# Altium PCB Can_Bus.PcbDoc
Units mm, origin at the board's own origin, x right, y up, seen from the top; angles counter-clockwise.
Board outline 23.9 x 15.9 mm, 2 copper layers (Top Layer, Bottom Layer); 8 components, 8 nets, 30 pads, 2 vias.
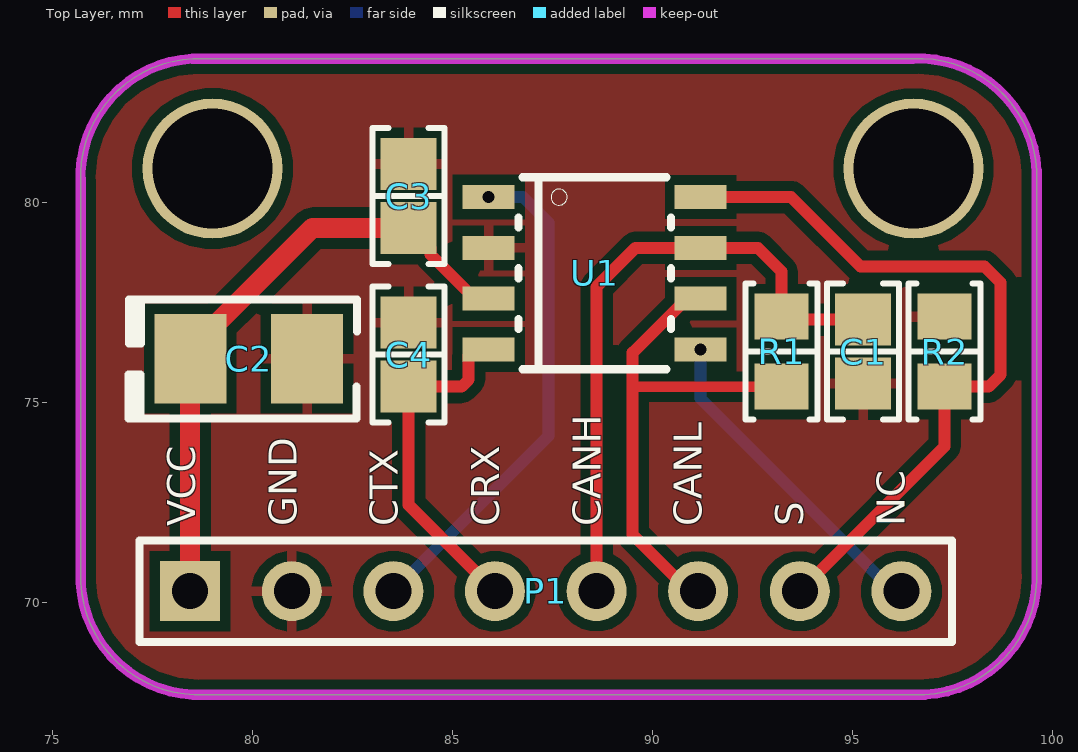
[diagram p0: Top Layer view]
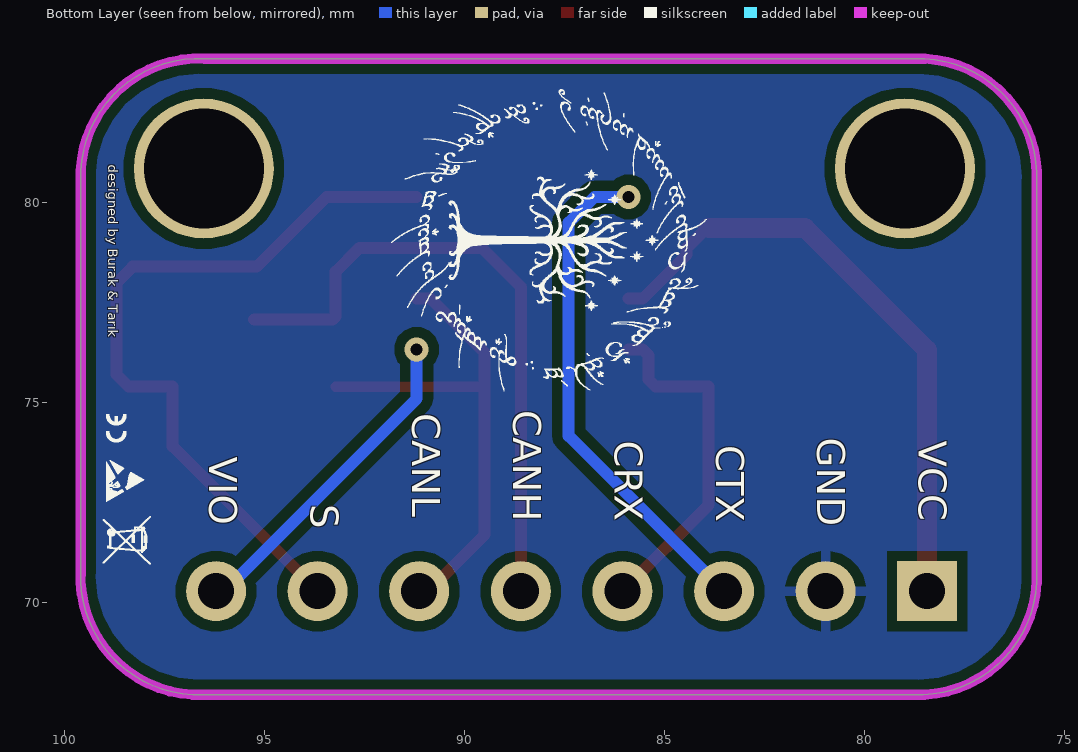
[diagram p1: Bottom Layer view, seen from below]
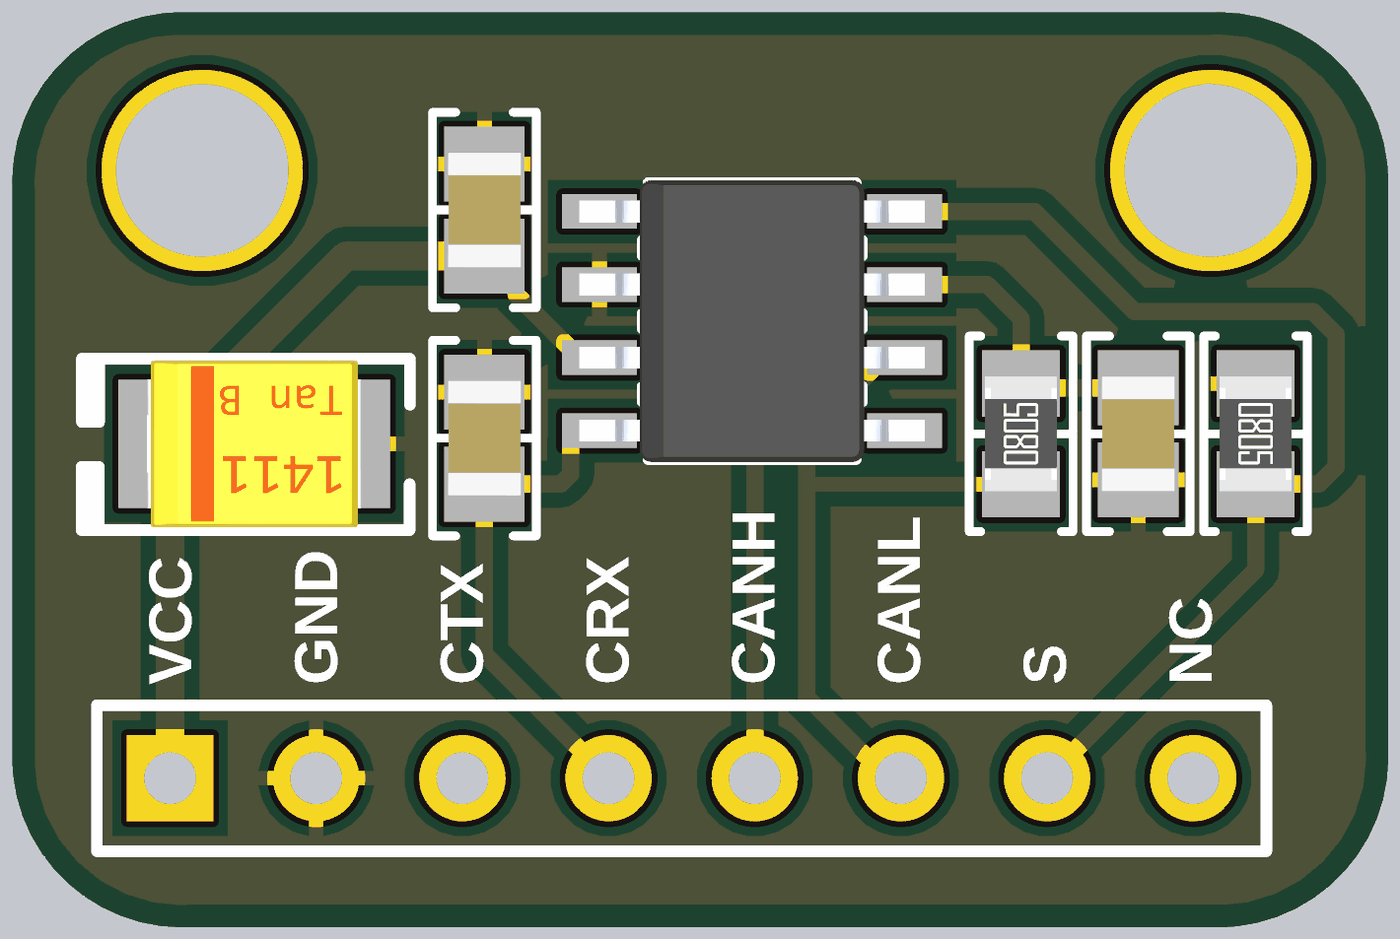
[diagram p2: 3D render of the assembled board from above, using the file's embedded part models]

## Layer stack, top to bottom
Top Solder: solder mask 0.0102, Solder Resist, Dk 3.5
Top Layer: signal copper 0.0356
Dielectric 1: dielectric 0.32, FR-4, Dk 4.8
Bottom Layer: signal copper 0.0356
Bottom Solder: solder mask 0.0102, Solder Resist, Dk 3.5

## Board outline
75.7,70.5 75.7,80.5 cw(c78.65,80.65) 78.5,83.6 96.5,83.6 cw(c96.65,80.65) 99.6,80.8 99.6,70.8 cw(c96.65,70.65) 96.8,67.7 78.8,67.7 cw(c78.65,70.65)

## Design rules (kind name [scope] priority, off if disabled: settings)
Clearance [All] p1: gap=0.254 ignorepadtopadclearanceinfootprint=FALSE except(0: Arc-Hole Track-Hole SMDPad-Hole THPad-Hole Via-Hole Fill-Hole Poly-Hole Region-Hole Text-Hole; 0.1: Arc-Text Track-Text SMDPad-Text THPad-Text Via-Text Fill-Text Poly-Text Region-Text Text-Text)
HoleSize [All] p1: absolutevalues=TRUE maxlimit=3.5 minlimit=0.025 maxpercent=80.000 minpercent=20.000
MinimumSolderMaskSliver [All] p1: minsoldermaskwidth=0.05
PolygonConnect [All] p1: connectstyle=Relief reliefconductorwidth=0.254 reliefentries=4 polygonreliefangle="90 Angle" airgapwidth=0.254
RoutingVias [InNet('No Net') And InDrillLayerPair('No Drill Pair')] p1: holewidth=3 width=3 viastyle="Through Hole" minholewidth=0.2 minwidth=0.2 maxholewidth=4 maxwidth=4
SilkToSilkClearance [All] p1: silktosilkclearance=0.1
SilkToSolderMaskClearance [IsPad] p1: minsilkscreentomaskgap=0.05 clearancetoexposedcopper=TRUE
SolderMaskExpansion [All] p1: expansion=0.102 istentingtop=FALSE
Width [All] p1: maxlimit=1.5 minlimit=0.254 preferedwidth=0.3 minimp=50.000000 maximp=50.000000 favimp=50.000000
26 further rules are at their usual default settings.

## Components (designator, comment, footprint, x,y, rotation, side; value= is the part's Value field where it differs from the comment)
C1 "100 pF" "CAP 0805_2012" 95.262,76.275 r90 top
C2 "47 µF" "CAP POL 1411_3528" 79.9,76.1 r0 top
C3 "0.1 µF" "CAP 0805_2012" 83.9,80.167 r270 top
C4 "15pF" "CAP 0805_2012" 83.9,76.2 r270 top
P1 "Header 8" HDR1X8 78.437,70.287 r0 top
R1 "120 Ohms" "RES 0805_2012" 93.225,76.275 r90 top
R2 "10 kOhms" "RES 0805_2012" 97.3,76.275 r270 top
U1 "TJA1051" SO8 86.01,80.14 r0 top

## Footprints (in the part's own frame and the unit in brackets; to place one, negate y for a bottom-side part, rotate by r counter-clockwise, add the part's x,y. Pads: shape width x height; smd on the part's side, far side on the other; paste and mask are expansions set on the pad)
"CAP 0805_2012" [mm] "Chip Capacitor, 2-Leads, Body 2.00x1.20mm, IPC Medium Density"
  rect 1.3x1.4 smd: 1(-0.8,0) 2(0.8,0)
  silkscreen extent -1.7,-0.9 1.7,0.9, body extent -1,-0.64 1,0.64, height 1.26
"CAP POL 1411_3528" [mm] "Molded Capacitor, 2-Leads, Body 3.50x2.80mm, IPC Medium Density"
  rect 1.8x2.23 smd: 1(-1.46,0) 2(1.46,0)
  silkscreen extent -3,-1.5 2.71,1.48, body extent -1.87,-1.45 1.86,1.45, height 2
HDR1X8 [mm] "Connector; Header; 8 Position"
  rect 1.5x1.5 hole 0.9: 1(0,0)
  round 1.5 hole 0.9: 2(2.54,0) 3(5.08,0) 4(7.62,0) 5(10.16,0) 6(12.7,0) 7(15.24,0) 8(17.78,0)
  silkscreen extent -1.27,-1.27 19.05,1.27
"RES 0805_2012" [mm] "Chip Resistor, 2-Leads, Body 2.00x1.25mm, IPC Medium Density"
  rect 1.15x1.35 smd: 1(-0.875,0) 2(0.875,0)
  silkscreen extent -1.7,-0.9 1.7,0.9, body extent -1,-0.62 1,0.63, height 0.6
SO8 [mm]
  rect 1.3x0.6 smd: 1(-0.11,0) 2(-0.11,-1.27) 3(-0.11,-2.54) 4(-0.11,-3.81) 5(5.19,-3.81) 6(5.19,-2.54) 7(5.19,-1.27) 8(5.19,0)
  silkscreen extent 0.64,-4.31 4.45,0.5, body extent -0.46,-4.36 5.54,0.55, height 1.75

## Part data
C1: library part C0805C101J5HACAUTO, "CAP CER 0805 100PF 50V ULTRA STA", Device Package="0805 (2012 Metric)", manufacturer=KEMET, Operating Temperature="-55°C ~ 150°C", Ratings=AEC-Q200, Supplier Part Number 1=399-16585-1-ND, Temperature Coefficient=X8R, Tolerance=±5%, Voltage - Rated=50V, Applications=Automotive, Capacitance="100 pF", componentlink1description=Datasheet, componentlink1url=https://api.kemet.com/component-edge/download/datasheet/C0805C101J5HACAUTO.pdf, componentlink2description="DigiKey Link", componentlink2url=https://www.digikey.com/en/products/detail/kemet/C0805C101J5HACAUTO/7943626, Features="Low ESL, High Temperature", lastupdated="9.02.2024 20:16:09", Lifecycle Status=Active, Minimum Order=1, Mounting Type="Surface Mount, MLCC", Package / Case="0805 (2012 Metric)", packaging=TapeAndReel, Part Number=C0805C101J5HACAUTO, Part Status=Active, partid=2585, price=0.01, series="SMD Auto X8R HT150C", Size / Dimension="0.079\" L x 0.049\" W (2.00mm x 1.25mm)", Supplier 1=DigiKey, Thickness (Max)="0.035\" (0.88mm)"
C2: library part T494B476K010AT, "CAP TANT 47UF 10% 10V 1411", Device Package="1411 (3528 Metric)", ESR (Equivalent Series Resistance)="650mOhm @ 100kHz", Lifetime @ Temp.="2000 Hrs @ 125°C", manufacturer=KEMET, Manufacturer Size Code=B, Operating Temperature="-55°C ~ 125°C", Supplier Part Number 1=399-18791-1-ND, Tolerance=±10%, Voltage - Rated="10 V", Capacitance="47 µF", componentlink1description=Datasheet, componentlink1url=https://api.kemet.com/component-edge/download/datasheet/T494B476K010AT.pdf, componentlink2description="DigiKey Link", componentlink2url=https://www.digikey.com/en/products/detail/kemet/T494B476K010AT/9642205, Features="General Purpose", Height - Seated (Max)="0.083\" (2.10mm)", lastupdated="11.03.2024 07:26:11", Lifecycle Status=Active, Minimum Order=1, Mounting Type="Surface Mount", Package / Case="1411 (3528 Metric)", packaging=TapeAndReel, Part Number=T494B476K010AT, Part Status=Active, partid=3, price=0.41, series=T494, Size / Dimension="0.138\" L x 0.110\" W (3.50mm x 2.80mm)", Supplier 1=DigiKey, Type=Molded
C3: library part CC0805MRX7R9BB104, "CAP CER 0.1UF 50V X7R 0805", Device Package="0805 (2012 Metric)", manufacturer=Yageo, Operating Temperature="-55°C ~ 125°C", Supplier Part Number 1=311-4351-1-ND, Temperature Coefficient=X7R, Tolerance=±20%, Voltage - Rated=50V, Applications="General Purpose", Capacitance="0.1 µF", componentlink1description=Datasheet, componentlink1url=https://www.yageo.com/upload/media/product/productsearch/datasheet/mlcc/UPY-GPHC_X7R_6.3V-to-50V_18.pdf, componentlink2description="DigiKey Link", componentlink2url=https://www.digikey.com/en/products/detail/yageo/CC0805MRX7R9BB104/5884281, lastupdated="9.02.2024 20:16:09", Lifecycle Status=Active, Minimum Order=1, Mounting Type="Surface Mount, MLCC", Package / Case="0805 (2012 Metric)", packaging=TapeAndReel, Part Number=CC0805MRX7R9BB104, Part Status=Active, partid=2475, price=0.01, series=CC, Size / Dimension="0.079\" L x 0.049\" W (2.00mm x 1.25mm)", Supplier 1=DigiKey, Thickness (Max)="0.037\" (0.95mm)"
C4: library part 08055A150JAT2A, "CAP CER 15PF 50V C0G/NP0 0805", Part Number=08055A150JAT2A
P1: "Header, 8-Pin", LatestRevisionDate=17-Jul-2002, LatestRevisionNote="Re-released for DXP Platform.", Publisher="Altium Limited"
R1: library part CRCW0805120RFKEAHP, "RES SMD 120 OHM 1% 1/2W 0805", Device Package="0805 (2012 Metric)", manufacturer="Vishay Dale", Operating Temperature="-55°C ~ 155°C", Power (Watts)="0.5W, 1/2W", Ratings=AEC-Q200, Supplier Device Package=0805, Supplier Part Number 1=541-120TCT-ND, Temperature Coefficient=±100ppm/°C, Tolerance=±1%, componentlink1description=Datasheet, componentlink1url=http://www.vishay.com/docs/20043/crcwhpe3.pdf, componentlink2description="DigiKey Link", componentlink2url=https://www.digikey.com/en/products/detail/vishay-dale/CRCW0805120RFKEAHP/2226864, Composition="Thick Film", Features="Automotive AEC-Q200, Pulse Withstanding", Height - Seated (Max)="0.020\" (0.50mm)", lastupdated="8.02.2024 21:02:28", Lifecycle Status=Active, Minimum Order=1, Number of Terminations=2, Package / Case="0805 (2012 Metric)", packaging=TapeAndReel, Part Number=CRCW0805120RFKEAHP, Part Status=Active, partid=30328, price=0.02, Resistance="120 Ohms", series=CRCW-HP, Size / Dimension="0.079\" L x 0.049\" W (2.00mm x 1.25mm)", Supplier 1=DigiKey
R2: library part RNCS0805BKE10K0, "RES 10K OHM 0.1% 1/10W 0805", Part Number=RNCS0805BKE10K0
U1: "IC TRANSCEIVER HALF 1/1 8SO", DigiKey Part Number=568-11885-2-ND, manufacturer="NXP USA Inc.", Manufacturer Product Number=TJA1051T/3/CM,118, Datasheet=https://www.nxp.com/docs/en/data-sheet/TJA1051.pdf, UNIT PRICE=$0.66910

## Free pads (board coordinates)
  round 3.5 hole 3: ""(78.996,80.853) ""(96.522,80.853)

## Via types
v1: diameter 0.6, hole 0.3, Top Layer to Bottom Layer, 2 vias

## Nets (pads, with @x,y where several pads share a name; then routed paths per layer and width w, separated by ;. In a path a pad name is that pad's centre, name@x,y a point inside that pad or via, vN(x,y) a via of type N, cw(c..) or ccw(c..) an arc to the next point about the centre after c; other vN are vias at no path point)
CANH: C1.2 P1.5 R1.2 U1.7 | length 16.1
  Top Layer w0.3: P1.5 88.597,77.897 89.57,78.87 U1.7 92.63,78.87 93.225,78.275 R1.2 93.3,77.075 C1.2
CANL: P1.6 R1.1 U1.6 | length 12.8
  Top Layer w0.254: 89.5,75.4 R1.1
  Top Layer w0.3: P1.6 90.913,70.287 89.5,71.7 89.5,75.4 89.5,76.25 90.85,77.6 U1.6
CRX: C4.2 P1.4 U1.4 | length 8.7
  Top Layer w0.3: U1.4 85.55,76.33 85.4,76.18 85.4,75.576 85.224,75.4 C4.2 83.9,72.443 P1.4
CTX: P1.3 U1.1 | length 12.6
  Bottom Layer w0.3: P1.3 87.4,74.17 87.4,79.5 86.76,80.14 v1(85.9,80.14)
GND: C1.1 C2.2 C3.1 C4.1 P1.2 R2.1 U1.2
NC: P1.8 U1.5 | length 8.2
  Bottom Layer w0.3: v1(91.2,76.33) 91.2,75.1 96.013,70.287 P1.8
S: P1.7 R2.2 U1.8 | length 18.8
  Top Layer w0.3: U1.8 93.46,80.14 95.2,78.4 98.3,78.4 98.7,78 98.7,75.7 98.4,75.4 R2.2 97.3,73.91 P1.7
VCC: C2.1 C3.2 P1.1 U1.3 | length 15.6
  Top Layer w0.3: C3.2 83.95,79.367 84.45,78.867 84.45,78.7 85.55,77.6 U1.3
  Top Layer w0.5: P1.1 78.437,76.097 C2.1 78.44,76.315 81.492,79.367 C3.2

## Polygon pours and split planes (outlines as drawn)
GND on Top Layer "GND_L01_P000" (solid, pour order 0): 75.7,83.6 99.6,83.6 99.6,67.7 75.7,67.7
GND on Bottom Layer "GND_L02_P001" (solid, pour order 1): 75.7,83.6 99.6,83.6 99.6,67.7 75.7,67.7

## Keep-outs
Keep-Out Layer:
  the board outline again, w0.254

## Silkscreen, mask and mechanical layers (free items; w line width, h text height)
Top Overlay:
  text "VCC" at 78.804,71.912 h1.2 r90
  text "GND" at 81.338,71.912 h1.2 r90
  text "CTX" at 83.87,71.912 h1.2 r90
  text "CRX" at 86.403,71.912 h1.2 r90
  text "CANH" at 88.935,71.912 h1.2 r90
  text "CANL" at 91.468,71.912 h1.2 r90
  text "S" at 94.001,71.912 h1.2 r90
  text "NC" at 96.534,71.912 h1.2 r90
Bottom Overlay:
  drawing of 10236 lines, arcs and shapes, not listed
  text "designed by Burak & Tarık" at 99,80.95 h0.4 r90
  text "CANH" at 89.019,74.805 h1.2 r90
  text "CANL" at 91.551,74.736 h1.2 r90
  text "GND" at 81.422,74.119 h1.2 r90
  text "VCC" at 78.889,74.049 h1.2 r90
  text "CRX" at 86.486,74.051 h1.2 r90
  text "CTX" at 83.954,73.933 h1.2 r90
  text "VIO" at 96.617,73.645 h1.2 r90
  text "S" at 94.084,72.464 h1.2 r90